# Altium PCB pwr_V1.1.PcbDoc (part 2 of 2)
Units mm, origin at the board's own origin, x right, y up, seen from the top; angles counter-clockwise.
Board outline 150.51 x 150.51 mm, 4 copper layers (Top Layer, GND, VCC, Bottom Layer); 133 components, 126 nets, 409 pads, 2275 vias.
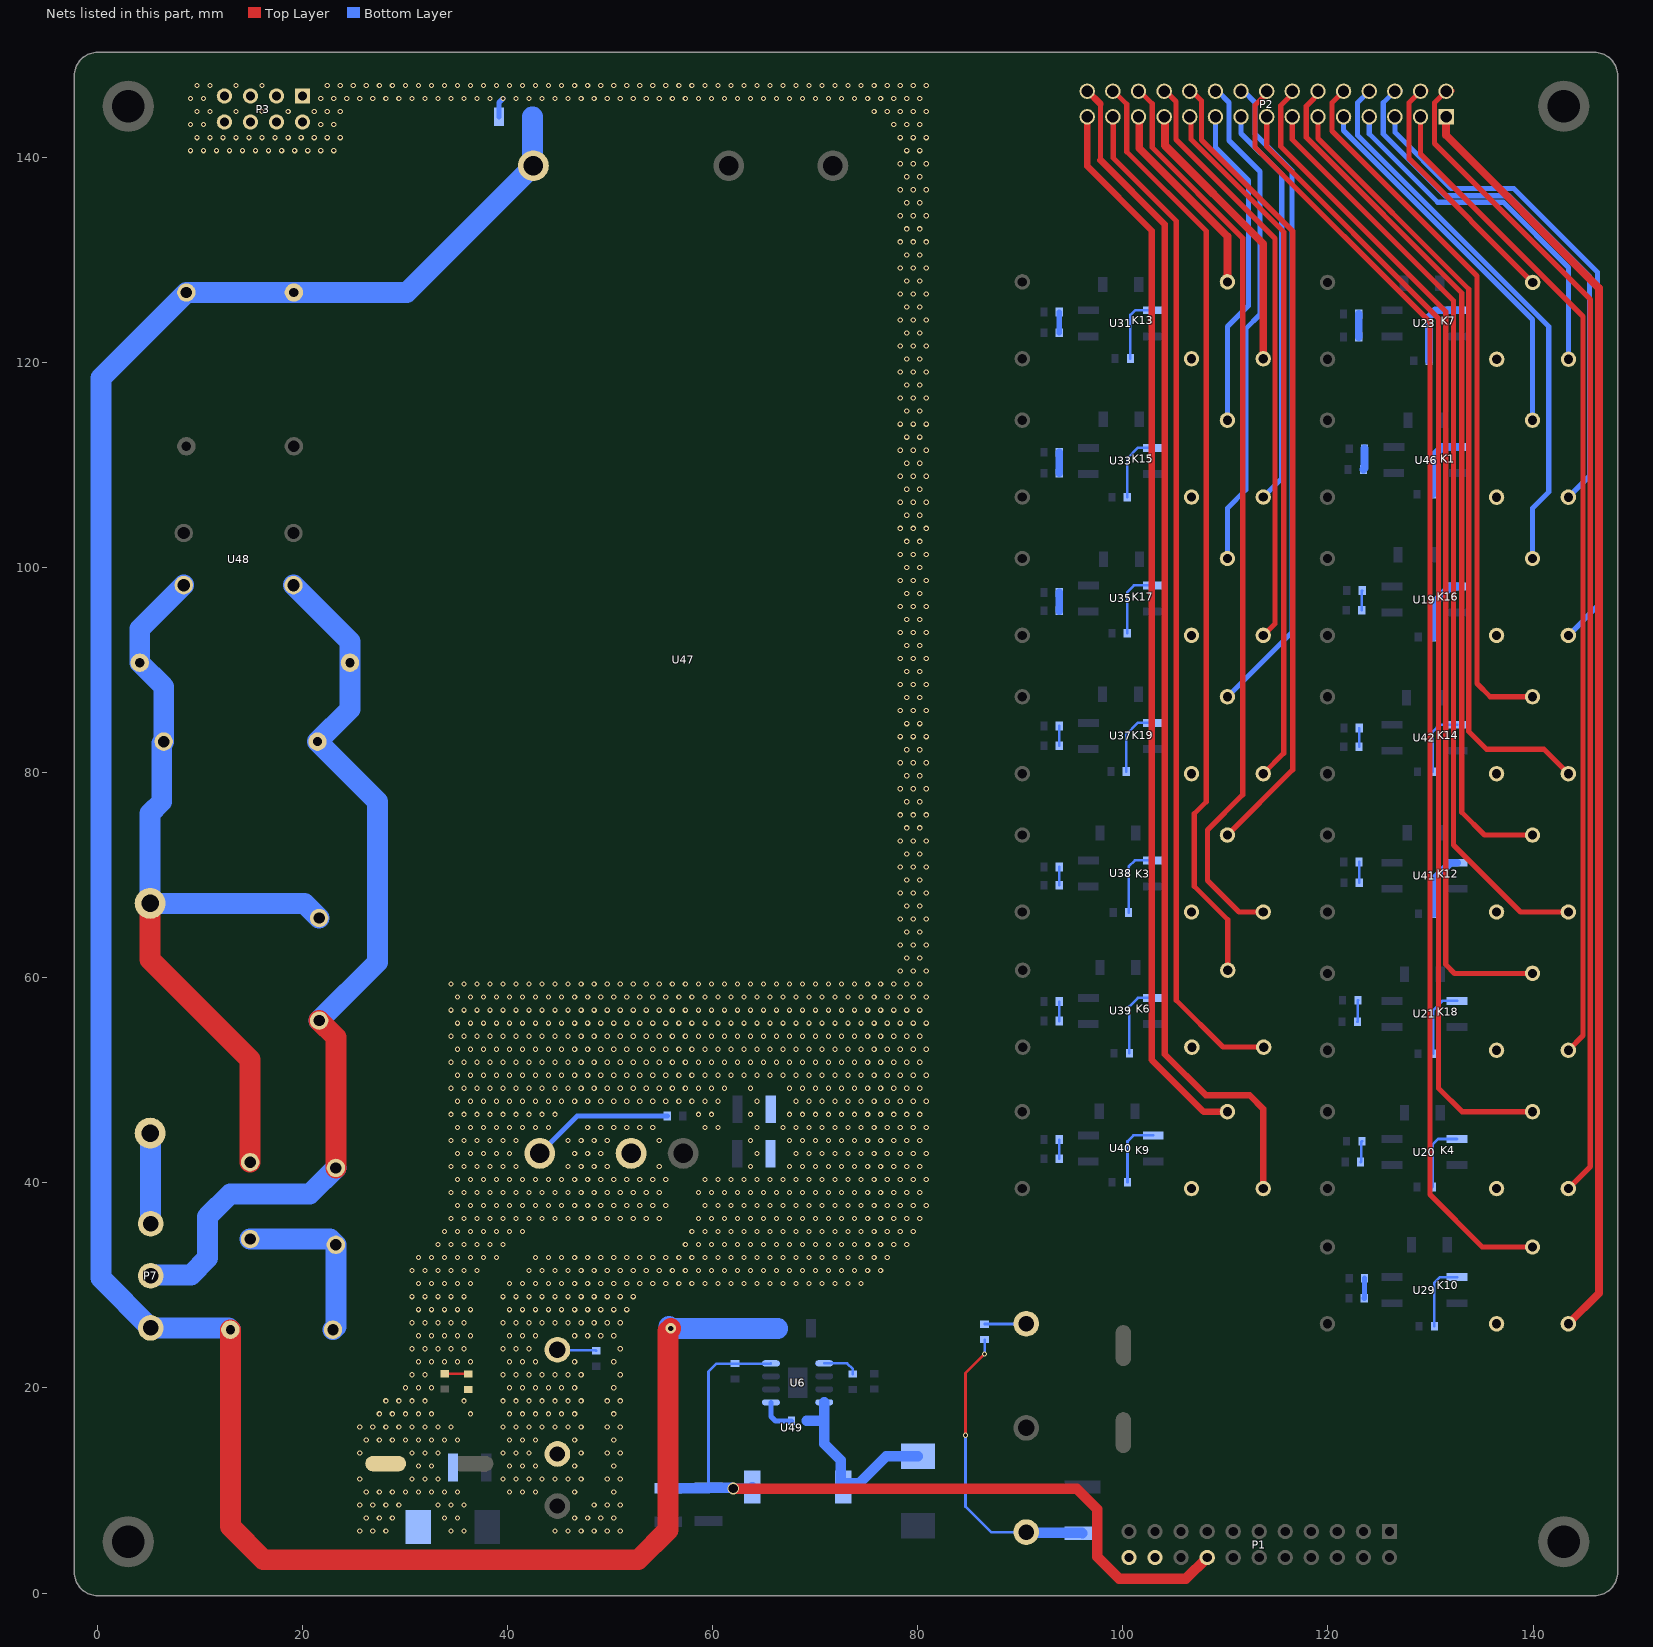
[diagram p2: the nets of this part, all layers, seen from the top]

## Via types
v1: diameter 0.508, hole 0.305, Top Layer to Bottom Layer, tented both sides, 2255 vias
v2: diameter 1.016, hole 0.508, Top Layer to Bottom Layer, tented both sides, 17 vias
v3: diameter 1.143, hole 0.889, Top Layer to Bottom Layer, tented both sides, 1 vias
v4: diameter 1.143, hole 0.762, Top Layer to Bottom Layer, tented both sides, 1 vias
v5: diameter 1.5, hole 1, Top Layer to Bottom Layer, 1 vias

## Nets (pads, with @x,y where several pads share a name; then routed paths per layer and width w, separated by ;. In a path a pad name is that pad's centre, name@x,y a point inside that pad or via, vN(x,y) a via of type N, cw(c..) or ccw(c..) an arc to the next point about the centre after c; other vN are vias at no path point) (continued)
GND: C44.2 C132.1 C134.1 C135.1 C136.1 D26.1 LED17.2 P1.20 P1.22 P3.1 P3.2 P3.3 P3.4 P3.5 P3.6 P3.7 P3.8 U47.5 U49.2 | length 1.9
  Bottom Layer w0.508: C132.1@39.168,143.967 39.168,145.361 v1(39.552,145.745)
  other v1: 25.582,6.045 26.852,6.045 28.122,6.045 34.472,6.045 35.742,6.045 44.632,6.045 45.902,6.045 47.172,6.045 48.442,6.045 49.712,6.045 50.982,6.045 26.217,7.315 27.487,7.315 28.757,7.315 33.837,7.315 35.107,7.315 46.537,7.315 47.807,7.315 49.077,7.315 50.347,7.315 25.582,8.585 26.852,8.585 28.122,8.585 29.392,8.585 33.202,8.585 34.472,8.585 35.742,8.585 48.442,8.585 49.712,8.585 50.982,8.585 26.217,9.855 27.487,9.855 28.757,9.855 30.027,9.855 31.297,9.855 32.567,9.855 33.837,9.855 35.107,9.855 40.187,9.855 41.457,9.855 42.727,9.855 46.537,9.855 50.347,9.855 25.582,11.125 30.662,11.125 31.932,11.125 33.202,11.125 39.552,11.125 40.822,11.125 42.092,11.125 43.362,11.125 44.632,11.125 45.902,11.125 47.172,11.125 49.712,11.125 50.982,11.125 31.297,12.395 32.567,12.395 40.187,12.395 41.457,12.395 42.727,12.395 46.537,12.395 50.347,12.395 25.582,13.665 30.662,13.665 31.932,13.665 33.202,13.665 39.552,13.665 40.822,13.665 42.092,13.665 47.172,13.665 49.712,13.665 50.982,13.665 26.217,14.935 27.487,14.935 28.757,14.935 30.027,14.935 31.297,14.935 32.567,14.935 33.837,14.935 35.107,14.935 40.187,14.935 41.457,14.935 42.727,14.935 46.537,14.935 50.347,14.935 25.582,16.205 26.852,16.205 28.122,16.205 29.392,16.205 30.662,16.205 31.932,16.205 33.202,16.205 34.472,16.205 39.552,16.205 40.822,16.205 42.092,16.205 43.362,16.205 44.632,16.205 45.902,16.205 47.172,16.205 49.712,16.205 50.982,16.205 27.487,17.475 28.757,17.475 30.027,17.475 31.297,17.475 32.567,17.475 36.377,17.475 40.187,17.475 41.457,17.475 42.727,17.475 43.997,17.475 45.267,17.475 46.537,17.475 50.347,17.475 28.122,18.745 29.392,18.745 30.662,18.745 31.932,18.745 35.742,18.745 39.552,18.745 40.822,18.745 42.092,18.745 43.362,18.745 44.632,18.745 45.902,18.745 47.172,18.745 49.712,18.745 50.982,18.745 30.027,20.015 31.297,20.015 32.567,20.015 40.187,20.015 41.457,20.015 42.727,20.015 43.997,20.015 45.267,20.015 46.537,20.015 50.347,20.015 30.662,21.285 31.932,21.285 39.552,21.285 40.822,21.285 42.092,21.285 43.362,21.285 44.632,21.285 45.902,21.285 47.172,21.285 50.982,21.285 31.297,22.555 32.567,22.555 33.837,22.555 35.107,22.555 36.377,22.555 40.187,22.555 41.457,22.555 42.727,22.555 46.537,22.555 50.347,22.555 30.662,23.825 31.932,23.825 33.202,23.825 34.472,23.825 35.742,23.825 39.552,23.825 40.822,23.825 42.092,23.825 50.982,23.825 31.297,25.095 32.567,25.095 33.837,25.095 35.107,25.095 36.377,25.095 40.187,25.095 41.457,25.095 42.727,25.095 46.537,25.095 47.807,25.095 49.077,25.095 50.347,25.095 30.662,26.365 31.932,26.365 33.202,26.365 34.472,26.365 35.742,26.365 39.552,26.365 40.822,26.365 42.092,26.365 43.362,26.365 44.632,26.365 45.902,26.365 47.172,26.365 48.442,26.365 49.712,26.365 50.982,26.365 31.297,27.635 32.567,27.635 33.837,27.635 35.107,27.635 36.377,27.635 40.187,27.635 41.457,27.635 42.727,27.635 43.997,27.635 45.267,27.635 46.537,27.635 47.807,27.635 49.077,27.635 50.347,27.635 51.617,27.635 30.662,28.905 31.932,28.905 33.202,28.905 34.472,28.905 35.742,28.905 39.552,28.905 40.822,28.905 42.092,28.905 43.362,28.905 44.632,28.905 45.902,28.905 47.172,28.905 48.442,28.905 49.712,28.905 50.982,28.905 52.252,28.905 31.297,30.175 32.567,30.175 33.837,30.175 35.107,30.175 36.377,30.175 40.187,30.175 41.457,30.175 42.727,30.175 43.997,30.175 45.267,30.175 46.537,30.175 47.807,30.175 49.077,30.175 50.347,30.175 51.617,30.175 52.887,30.175 54.157,30.175 55.427,30.175 56.697,30.175 57.967,30.175 59.237,30.175 60.507,30.175 61.777,30.175 63.047,30.175 64.317,30.175 65.587,30.175 66.857,30.175 68.127,30.175 69.397,30.175 70.667,30.175 71.937,30.175 73.207,30.175 74.477,30.175 30.662,31.445 31.932,31.445 33.202,31.445 34.472,31.445 35.742,31.445 37.012,31.445 42.092,31.445 43.362,31.445 44.632,31.445 45.902,31.445 47.172,31.445 48.442,31.445 49.712,31.445 50.982,31.445 52.252,31.445 53.522,31.445 54.792,31.445 56.062,31.445 57.332,31.445 58.602,31.445 59.872,31.445 61.142,31.445 62.412,31.445 63.682,31.445 64.952,31.445 66.222,31.445 67.492,31.445 68.762,31.445 70.032,31.445 71.302,31.445 72.572,31.445 73.842,31.445 75.112,31.445 76.382,31.445 31.297,32.715 32.567,32.715 33.837,32.715 35.107,32.715 36.377,32.715 37.647,32.715 38.917,32.715 42.727,32.715 43.997,32.715 45.267,32.715 46.537,32.715 47.807,32.715 49.077,32.715 50.347,32.715 51.617,32.715 52.887,32.715 54.157,32.715 55.427,32.715 56.697,32.715 57.967,32.715 59.237,32.715 60.507,32.715 61.777,32.715 63.047,32.715 64.317,32.715 65.587,32.715 66.857,32.715 68.127,32.715 69.397,32.715 70.667,32.715 71.937,32.715 73.207,32.715 74.477,32.715 75.747,32.715 77.017,32.715 33.202,33.985 34.472,33.985 35.742,33.985 37.012,33.985 38.282,33.985 39.552,33.985 57.332,33.985 58.602,33.985 59.872,33.985 61.142,33.985 62.412,33.985 63.682,33.985 64.952,33.985 66.222,33.985 67.492,33.985 68.762,33.985 70.032,33.985 71.302,33.985 72.572,33.985 73.842,33.985 75.112,33.985 76.382,33.985 77.652,33.985 78.922,33.985 33.837,35.255 35.107,35.255 36.377,35.255 37.647,35.255 38.917,35.255 40.187,35.255 41.457,35.255 57.967,35.255 59.237,35.255 60.507,35.255 61.777,35.255 63.047,35.255 64.317,35.255 65.587,35.255 66.857,35.255 68.127,35.255 69.397,35.255 70.667,35.255 71.937,35.255 73.207,35.255 74.477,35.255 75.747,35.255 77.017,35.255 78.287,35.255 79.557,35.255 34.472,36.525 35.742,36.525 37.012,36.525 38.282,36.525 39.552,36.525 40.822,36.525 42.092,36.525 43.362,36.525 44.632,36.525 45.902,36.525 47.172,36.525 48.442,36.525 49.712,36.525 50.982,36.525 52.252,36.525 53.522,36.525 54.792,36.525 58.602,36.525 59.872,36.525 61.142,36.525 62.412,36.525 63.682,36.525 64.952,36.525 66.222,36.525 67.492,36.525 68.762,36.525 70.032,36.525 71.302,36.525 72.572,36.525 73.842,36.525 75.112,36.525 76.382,36.525 77.652,36.525 78.922,36.525 80.192,36.525 35.107,37.795 36.377,37.795 37.647,37.795 38.917,37.795 40.187,37.795 41.457,37.795 42.727,37.795 43.997,37.795 45.267,37.795 46.537,37.795 47.807,37.795 49.077,37.795 50.347,37.795 51.617,37.795 52.887,37.795 54.157,37.795 55.427,37.795 59.237,37.795 60.507,37.795 61.777,37.795 63.047,37.795 64.317,37.795 65.587,37.795 66.857,37.795 68.127,37.795 69.397,37.795 70.667,37.795 71.937,37.795 73.207,37.795 74.477,37.795 75.747,37.795 77.017,37.795 78.287,37.795 79.557,37.795 80.827,37.795 34.472,39.065 35.742,39.065 37.012,39.065 38.282,39.065 39.552,39.065 40.822,39.065 42.092,39.065 43.362,39.065 44.632,39.065 45.902,39.065 47.172,39.065 48.442,39.065 49.712,39.065 50.982,39.065 52.252,39.065 53.522,39.065 54.792,39.065 58.602,39.065 59.872,39.065 61.142,39.065 62.412,39.065 63.682,39.065 64.952,39.065 66.222,39.065 67.492,39.065 68.762,39.065 70.032,39.065 71.302,39.065 72.572,39.065 73.842,39.065 75.112,39.065 76.382,39.065 77.652,39.065 78.922,39.065 80.192,39.065 35.107,40.335 36.377,40.335 37.647,40.335 38.917,40.335 40.187,40.335 41.457,40.335 42.727,40.335 43.997,40.335 45.267,40.335 46.537,40.335 47.807,40.335 49.077,40.335 50.347,40.335 51.617,40.335 52.887,40.335 54.157,40.335 55.427,40.335 59.237,40.335 60.507,40.335 61.777,40.335 63.047,40.335 64.317,40.335 65.587,40.335 66.857,40.335 68.127,40.335 69.397,40.335 70.667,40.335 71.937,40.335 73.207,40.335 74.477,40.335 75.747,40.335 77.017,40.335 78.287,40.335 79.557,40.335 80.827,40.335 34.472,41.605 35.742,41.605 37.012,41.605 38.282,41.605 39.552,41.605 40.822,41.605 45.902,41.605 47.172,41.605 48.442,41.605 49.712,41.605 54.792,41.605 63.682,41.605 67.492,41.605 68.762,41.605 70.032,41.605 71.302,41.605 72.572,41.605 73.842,41.605 75.112,41.605 76.382,41.605 77.652,41.605 78.922,41.605 80.192,41.605 35.107,42.875 36.377,42.875 37.647,42.875 38.917,42.875 40.187,42.875 46.537,42.875 47.807,42.875 49.077,42.875 64.317,42.875 68.127,42.875 69.397,42.875 70.667,42.875 71.937,42.875 73.207,42.875 74.477,42.875 75.747,42.875 77.017,42.875 78.287,42.875 79.557,42.875 80.827,42.875 34.472,44.145 35.742,44.145 37.012,44.145 38.282,44.145 39.552,44.145 40.822,44.145 45.902,44.145 47.172,44.145 48.442,44.145 49.712,44.145 54.792,44.145 63.682,44.145 67.492,44.145 68.762,44.145 70.032,44.145 71.302,44.145 72.572,44.145 73.842,44.145 75.112,44.145 76.382,44.145 77.652,44.145 78.922,44.145 80.192,44.145 35.107,45.415 36.377,45.415 37.647,45.415 38.917,45.415 40.187,45.415 41.457,45.415 42.727,45.415 43.997,45.415 47.807,45.415 49.077,45.415 50.347,45.415 51.617,45.415 52.887,45.415 54.157,45.415 59.237,45.415 60.507,45.415 64.317,45.415 66.857,45.415 68.127,45.415 69.397,45.415 70.667,45.415 71.937,45.415 73.207,45.415 74.477,45.415 75.747,45.415 77.017,45.415 78.287,45.415 79.557,45.415 80.827,45.415 34.472,46.685 35.742,46.685 37.012,46.685 38.282,46.685 39.552,46.685 40.822,46.685 42.092,46.685 43.362,46.685 44.632,46.685 58.602,46.685 59.872,46.685 63.682,46.685 67.492,46.685 68.762,46.685 70.032,46.685 71.302,46.685 72.572,46.685 73.842,46.685 75.112,46.685 76.382,46.685 77.652,46.685 78.922,46.685 80.192,46.685 35.107,47.955 36.377,47.955 37.647,47.955 38.917,47.955 40.187,47.955 41.457,47.955 42.727,47.955 43.997,47.955 45.267,47.955 46.537,47.955 47.807,47.955 49.077,47.955 50.347,47.955 51.617,47.955 52.887,47.955 54.157,47.955 55.427,47.955 56.697,47.955 57.967,47.955 59.237,47.955 60.507,47.955 64.317,47.955 68.127,47.955 69.397,47.955 70.667,47.955 71.937,47.955 73.207,47.955 74.477,47.955 75.747,47.955 77.017,47.955 78.287,47.955 79.557,47.955 80.827,47.955 34.472,49.225 35.742,49.225 37.012,49.225 38.282,49.225 39.552,49.225 40.822,49.225 42.092,49.225 43.362,49.225 44.632,49.225 45.902,49.225 47.172,49.225 48.442,49.225 49.712,49.225 50.982,49.225 52.252,49.225 53.522,49.225 54.792,49.225 56.062,49.225 57.332,49.225 58.602,49.225 59.872,49.225 61.142,49.225 63.682,49.225 67.492,49.225 68.762,49.225 70.032,49.225 71.302,49.225 72.572,49.225 73.842,49.225 75.112,49.225 76.382,49.225 77.652,49.225 78.922,49.225 80.192,49.225 35.107,50.495 36.377,50.495 37.647,50.495 38.917,50.495 40.187,50.495 41.457,50.495 42.727,50.495 43.997,50.495 45.267,50.495 46.537,50.495 47.807,50.495 49.077,50.495 50.347,50.495 51.617,50.495 52.887,50.495 54.157,50.495 55.427,50.495 56.697,50.495 57.967,50.495 59.237,50.495 60.507,50.495 61.777,50.495 63.047,50.495 64.317,50.495 65.587,50.495 66.857,50.495 68.127,50.495 69.397,50.495 70.667,50.495 71.937,50.495 73.207,50.495 74.477,50.495 75.747,50.495 77.017,50.495 78.287,50.495 79.557,50.495 80.827,50.495 34.472,51.765 35.742,51.765 37.012,51.765 38.282,51.765 39.552,51.765 40.822,51.765 42.092,51.765 43.362,51.765 44.632,51.765 45.902,51.765 47.172,51.765 48.442,51.765 49.712,51.765 50.982,51.765 52.252,51.765 53.522,51.765 54.792,51.765 56.062,51.765 57.332,51.765 58.602,51.765 59.872,51.765 61.142,51.765 62.412,51.765 63.682,51.765 64.952,51.765 66.222,51.765 67.492,51.765 68.762,51.765 70.032,51.765 71.302,51.765 72.572,51.765 73.842,51.765 75.112,51.765 76.382,51.765 77.652,51.765 78.922,51.765 80.192,51.765 35.107,53.035 36.377,53.035 37.647,53.035 38.917,53.035 40.187,53.035 41.457,53.035 42.727,53.035 43.997,53.035 45.267,53.035 46.537,53.035 47.807,53.035 49.077,53.035 50.347,53.035 51.617,53.035 52.887,53.035 54.157,53.035 55.427,53.035 56.697,53.035 57.967,53.035 59.237,53.035 60.507,53.035 61.777,53.035 63.047,53.035 64.317,53.035 65.587,53.035 66.857,53.035 68.127,53.035 69.397,53.035 70.667,53.035 71.937,53.035 73.207,53.035 74.477,53.035 75.747,53.035 77.017,53.035 78.287,53.035 79.557,53.035 80.827,53.035 34.472,54.305 35.742,54.305 37.012,54.305 38.282,54.305 39.552,54.305 40.822,54.305 42.092,54.305 43.362,54.305 44.632,54.305 45.902,54.305 47.172,54.305 48.442,54.305 49.712,54.305 50.982,54.305 52.252,54.305 53.522,54.305 54.792,54.305 56.062,54.305 57.332,54.305 58.602,54.305 59.872,54.305 61.142,54.305 62.412,54.305 63.682,54.305 64.952,54.305 66.222,54.305 67.492,54.305 68.762,54.305 70.032,54.305 71.302,54.305 72.572,54.305 73.842,54.305 75.112,54.305 76.382,54.305 77.652,54.305 78.922,54.305 80.192,54.305 35.107,55.575 36.377,55.575 37.647,55.575 38.917,55.575 40.187,55.575 41.457,55.575 42.727,55.575 43.997,55.575 45.267,55.575 46.537,55.575 47.807,55.575 49.077,55.575 50.347,55.575 51.617,55.575 52.887,55.575 54.157,55.575 55.427,55.575 56.697,55.575 57.967,55.575 59.237,55.575 60.507,55.575 61.777,55.575 63.047,55.575 64.317,55.575 65.587,55.575 66.857,55.575 68.127,55.575 69.397,55.575 70.667,55.575 71.937,55.575 73.207,55.575 74.477,55.575 75.747,55.575 77.017,55.575 78.287,55.575 79.557,55.575 80.827,55.575 34.472,56.845 35.742,56.845 37.012,56.845 38.282,56.845 39.552,56.845 40.822,56.845 42.092,56.845 43.362,56.845 44.632,56.845 45.902,56.845 47.172,56.845 48.442,56.845 49.712,56.845 50.982,56.845 52.252,56.845 53.522,56.845 54.792,56.845 56.062,56.845 57.332,56.845 58.602,56.845 59.872,56.845 61.142,56.845 62.412,56.845 63.682,56.845 64.952,56.845 66.222,56.845 67.492,56.845 68.762,56.845 70.032,56.845 71.302,56.845 72.572,56.845 73.842,56.845 75.112,56.845 76.382,56.845 77.652,56.845 78.922,56.845 80.192,56.845 35.107,58.115 36.377,58.115 37.647,58.115 38.917,58.115 40.187,58.115 41.457,58.115 42.727,58.115 43.997,58.115 45.267,58.115 46.537,58.115 47.807,58.115 49.077,58.115 50.347,58.115 51.617,58.115 52.887,58.115 54.157,58.115 55.427,58.115 56.697,58.115 57.967,58.115 59.237,58.115 60.507,58.115 61.777,58.115 63.047,58.115 64.317,58.115 65.587,58.115 66.857,58.115 68.127,58.115 69.397,58.115 70.667,58.115 71.937,58.115 73.207,58.115 74.477,58.115 75.747,58.115 77.017,58.115 78.287,58.115 79.557,58.115 80.827,58.115 34.472,59.385 35.742,59.385 37.012,59.385 38.282,59.385 39.552,59.385 40.822,59.385 42.092,59.385 43.362,59.385 44.632,59.385 45.902,59.385 47.172,59.385 48.442,59.385 49.712,59.385 50.982,59.385 52.252,59.385 53.522,59.385 54.792,59.385 56.062,59.385 57.332,59.385 58.602,59.385 59.872,59.385 61.142,59.385 62.412,59.385 63.682,59.385 64.952,59.385 66.222,59.385 67.492,59.385 68.762,59.385 70.032,59.385 71.302,59.385 72.572,59.385 73.842,59.385 75.112,59.385 76.382,59.385 77.652,59.385 78.922,59.385 80.192,59.385 78.287,60.655 79.557,60.655 80.827,60.655 78.922,61.925 80.192,61.925 78.287,63.195 79.557,63.195 80.827,63.195 78.922,64.465 80.192,64.465 78.287,65.735 79.557,65.735 80.827,65.735 78.922,67.005 80.192,67.005 78.287,68.275 79.557,68.275 80.827,68.275 78.922,69.545 80.192,69.545 78.287,70.815 79.557,70.815 80.827,70.815 78.922,72.085 80.192,72.085 78.287,73.355 79.557,73.355 80.827,73.355 78.922,74.625 80.192,74.625 78.287,75.895 79.557,75.895 80.827,75.895 78.922,77.165 80.192,77.165 78.287,78.435 79.557,78.435 80.827,78.435 78.922,79.705 80.192,79.705 78.287,80.975 79.557,80.975 80.827,80.975 78.922,82.245 80.192,82.245 78.287,83.515 79.557,83.515 80.827,83.515 78.922,84.785 80.192,84.785 78.287,86.055 79.557,86.055 80.827,86.055 78.922,87.325 80.192,87.325 78.287,88.595 79.557,88.595 80.827,88.595 78.922,89.865 80.192,89.865 78.287,91.135 79.557,91.135 80.827,91.135 78.922,92.405 80.192,92.405 78.287,93.675 79.557,93.675 80.827,93.675 78.922,94.945 80.192,94.945 78.287,96.215 79.557,96.215 80.827,96.215 78.922,97.485 80.192,97.485 78.287,98.755 79.557,98.755 80.827,98.755 78.922,100.025 80.192,100.025 78.287,101.295 79.557,101.295 80.827,101.295 78.922,102.565 80.192,102.565 78.287,103.835 79.557,103.835 80.827,103.835 78.922,105.105 80.192,105.105 78.287,106.375 79.557,106.375 80.827,106.375 78.922,107.645 80.192,107.645 78.287,108.915 79.557,108.915 80.827,108.915 78.922,110.185 80.192,110.185 78.287,111.455 79.557,111.455 80.827,111.455 78.922,112.725 80.192,112.725 78.287,113.995 79.557,113.995 80.827,113.995 78.922,115.265 80.192,115.265 78.287,116.535 79.557,116.535 80.827,116.535 78.922,117.805 80.192,117.805 78.287,119.075 79.557,119.075 80.827,119.075 78.922,120.345 80.192,120.345 78.287,121.615 79.557,121.615 80.827,121.615 78.922,122.885 80.192,122.885 78.287,124.155 79.557,124.155 80.827,124.155 78.922,125.425 80.192,125.425 78.287,126.695 79.557,126.695 80.827,126.695 78.922,127.965 80.192,127.965 78.287,129.235 79.557,129.235 80.827,129.235 78.922,130.505 80.192,130.505 78.287,131.775 79.557,131.775 80.827,131.775 78.922,133.045 80.192,133.045 78.287,134.315 79.557,134.315 80.827,134.315 78.922,135.585 80.192,135.585 78.287,136.855 79.557,136.855 80.827,136.855 78.922,138.125 80.192,138.125 78.287,139.395 79.557,139.395 80.827,139.395 9.072,140.665 10.342,140.665 11.612,140.665 12.882,140.665 14.152,140.665 15.422,140.665 16.692,140.665 17.962,140.665 19.232,140.665 20.502,140.665 21.772,140.665 23.042,140.665 78.922,140.665 80.192,140.665 9.707,141.935 10.977,141.935 12.247,141.935 13.517,141.935 14.787,141.935 16.057,141.935 17.327,141.935 18.597,141.935 19.867,141.935 21.137,141.935 22.407,141.935 23.677,141.935 78.287,141.935 79.557,141.935 80.827,141.935 9.072,143.205 10.342,143.205 21.772,143.205 23.042,143.205 77.652,143.205 78.922,143.205 80.192,143.205 9.707,144.475 10.977,144.475 13.517,144.475 16.057,144.475 18.597,144.475 21.137,144.475 22.407,144.475 23.677,144.475 75.747,144.475 77.017,144.475 78.287,144.475 79.557,144.475 80.827,144.475 9.072,145.745 10.342,145.745 21.772,145.745 23.042,145.745 24.312,145.745 25.582,145.745 26.852,145.745 28.122,145.745 29.392,145.745 30.662,145.745 31.932,145.745 33.202,145.745 34.472,145.745 35.742,145.745 37.012,145.745 38.282,145.745 40.822,145.745 42.092,145.745 43.362,145.745 44.632,145.745 45.902,145.745 47.172,145.745 48.442,145.745 49.712,145.745 50.982,145.745 52.252,145.745 53.522,145.745 54.792,145.745 56.062,145.745 57.332,145.745 58.602,145.745 59.872,145.745 61.142,145.745 62.412,145.745 63.682,145.745 64.952,145.745 66.222,145.745 67.492,145.745 68.762,145.745 70.032,145.745 71.302,145.745 72.572,145.745 73.842,145.745 75.112,145.745 76.382,145.745 77.652,145.745 78.922,145.745 80.192,145.745 9.707,147.015 10.977,147.015 13.517,147.015 16.057,147.015 22.407,147.015 23.677,147.015 24.947,147.015 26.217,147.015 27.487,147.015 28.757,147.015 30.027,147.015 31.297,147.015 32.567,147.015 33.837,147.015 35.107,147.015 36.377,147.015 37.647,147.015 38.917,147.015 40.187,147.015 41.457,147.015 42.727,147.015 43.997,147.015 45.267,147.015 46.537,147.015 47.807,147.015 49.077,147.015 50.347,147.015 51.617,147.015 52.887,147.015 54.157,147.015 55.427,147.015 56.697,147.015 57.967,147.015 59.237,147.015 60.507,147.015 61.777,147.015 63.047,147.015 64.317,147.015 65.587,147.015 66.857,147.015 68.127,147.015 69.397,147.015 70.667,147.015 71.937,147.015 73.207,147.015 74.477,147.015 75.747,147.015 77.017,147.015 78.287,147.015 79.557,147.015 80.827,147.015
NetC62_2: C62.2 C129.1 C131.2 C132.2 P7.3 R177.1 U47.3 | length 252.9
  Top Layer w2.032: R177.1@12.961,25.679 12.961,6.496 16.205,3.251 52.743,3.251 55.651,6.16 55.651,25.552 v2(55.905,25.806)
  Bottom Layer w2.032: R177.1@12.961,25.679 12.783,25.857 P7.3@5.188,25.857 0.33,30.715 0.33,118.498 C131.2@8.668,126.836 C129.1@19.152,126.836 30.157,126.836 U47.3@42.516,139.195 42.418,139.293 C132.2@42.418,143.967 ; v2@55.728,25.984 v2(55.905,25.806) C62.2@66.345,25.806
NetC87_2: C87.2 R123.1 | length 2
  Bottom Layer w0.254: R123.1@123.292,95.834 123.317,95.86 123.317,97.739 C87.2@123.342,97.765
NetC88_2: C88.2 R125.1 | length 2.1
  Bottom Layer w0.254: R125.1@123.19,42.037 123.254,42.101 123.254,44.005 C88.2@123.318,44.069
NetC89_2: C89.2 R126.1 | length 2.1
  Bottom Layer w0.254: R126.1@122.885,55.702 122.911,55.728 122.911,57.785 C89.2@122.936,57.81
NetC90_2: C90.2 R122.1 | length 2.1
  Bottom Layer w0.762: R122.1@123.471,109.576 123.471,109.589 123.572,109.69 C90.2@123.572,111.608
NetC91_2: C91.2 R129.1 | length 2.2
  Bottom Layer w0.762: R129.1@123.014,122.504 C91.2@123.013,124.739
NetC93_2: C93.2 R133.1 | length 2
  Bottom Layer w0.508: R133.1@123.547,28.748 123.559,28.76 123.559,30.692 C93.2@123.571,30.704
NetC95_2: C95.2 R137.1 | length 2
  Bottom Layer w0.508: R137.1@93.802,122.911 C95.2@93.802,124.943
NetC98_2: C98.2 R141.1 | length 2
  Bottom Layer w0.762: R141.1@93.802,109.22 C98.2@93.802,111.252
NetC102_2: C102.2 R145.1 | length 1.8
  Bottom Layer w0.762: R145.1@93.802,95.783 C102.2@93.802,97.587
NetC104_2: C104.2 R149.1 | length 1.9
  Bottom Layer w0.254: R149.1@93.802,82.626 C104.2@93.802,84.557
NetC106_2: C106.2 R151.1 | length 1.8
  Bottom Layer w0.254: R151.1@93.802,69.037 C106.2@93.802,70.815
NetC107_2: C107.2 R153.1 | length 1.9
  Bottom Layer w0.254: R153.1@93.802,55.778 C107.2@93.802,57.683
NetC109_2: C109.2 R155.1 | length 1.9
  Bottom Layer w0.254: R155.1@93.802,42.367 C109.2@93.802,44.221
NetC110_2: C110.2 R157.1 | length 2
  Bottom Layer w0.254: C110.2@123.038,71.298 123.05,71.285 123.05,69.279 R157.1@123.063,69.266
NetC111_2: C111.2 R159.1 | length 1.8
  Bottom Layer w0.254: R159.1@123.038,82.525 123.05,82.537 123.05,84.341 C111.2@123.063,84.353
NetC130_1: C130.1 P7.2 R174.2 R175.1 R176.1 U48.1 | length 90.7
  Top Layer w2.032: R175.1@21.615,55.829 23.248,54.197 R176.1@23.248,41.46
  Bottom Layer w2.032: P7.2@5.188,30.937 5.278,31.027 9.107,31.027 10.744,32.664 10.744,36.703 12.954,38.913 20.701,38.913 R176.1@23.248,41.46 ; U48.1@19.114,98.298 24.621,92.791 R174.2@24.621,90.729 24.621,86.196 C130.1@21.458,83.033 27.305,77.186 27.305,61.519 R175.1@21.615,55.829
NetC130_2: C130.2 F3.2 R173.2 R174.1 R175.2 U48.2 | length 80.7
  Top Layer w2.032: F3.2@5.131,67.256 5.131,61.798 14.891,52.038 R173.2@14.891,42.019
  Bottom Layer w2.032: U48.2@8.414,98.298 4.121,94.005 R174.1@4.121,90.729 6.458,88.392 C130.2@6.458,83.033 6.274,82.848 6.274,77.165 5.131,76.022 F3.2@5.131,67.256 20.188,67.256 R175.2@21.615,65.829
NetC137_1: C137.1 D4.2 L3.1 U6.8 | length 19.3
  Bottom Layer w1.016: C137.1@69.19,16.789 70.667,16.789 70.875,16.582 ; U6.8@70.875,18.593 70.875,16.582 ; D4.2@80.01,13.329 76.905,13.329 74.27,10.693 73.038,10.693 72.746,10.401 L3.1@72.746,10.338 72.492,10.592 72.492,12.954 70.875,14.57 70.875,16.582
NetC137_2: C137.2 U6.1 | length 3.6
  Bottom Layer w0.508: U6.1@65.675,18.593 65.675,17.23 66.116,16.789 C137.2@67.69,16.789
NetF3_1: F3.1 P7.1 | length 8.9
  Bottom Layer w2.032: F3.1@5.131,44.856 5.159,44.828 5.159,36.046 P7.1@5.188,36.017
NetF4_1: F4.1 R178.2 U49.4 | length 29.5
  Top Layer w0.254: v1(84.658,15.392) 84.658,21.463 v1(86.512,23.317)
  Bottom Layer w0.254: v1(84.658,15.392) 84.658,8.433 87.147,5.944 U49.4@90.576,5.944 ; v1(86.512,23.317) R178.2@86.512,24.714
  Bottom Layer w1.016: U49.4@90.576,5.944 90.627,5.893 96.012,5.893 F4.1@96.063,5.842
NetLED17_1: LED17.1 R102.1 | length 2.3
  Top Layer w0.254: R102.1@33.858,21.388 33.871,21.375 36.157,21.375 LED17.1@36.17,21.363
NetR25_2: R25.2 U49.1 | length 3.8
  Bottom Layer w0.254: U49.1@44.856,23.724 44.906,23.674 48.591,23.674 R25.2@48.641,23.623
NetR31_1: R31.1 U47.4 | length 14
  Bottom Layer w0.508: U47.4@43.136,42.875 46.793,46.533 R31.1@55.575,46.533
NetR107_1: R107.1 U46.1 | length 6.6
  Bottom Layer w0.762: R107.1@130.2,107.163 130.2,110.795 131.166,111.76 U46.1@132.766,111.76
NetR124_1: R124.1 U19.1 | length 6.2
  Bottom Layer w0.762: R124.1@130.302,93.243 130.302,96.505 131.953,98.156 U19.1@132.588,98.156
NetR127_1: R127.1 U20.1 | length 6.8
  Bottom Layer w0.254: R127.1@130.202,39.599 130.202,43.74 130.741,44.279 U20.1@132.588,44.279
NetR128_1: R128.1 U21.1 | length 6.9
  Bottom Layer w0.254: R128.1@130.278,52.603 130.278,56.872 131.155,57.749 U21.1@132.588,57.749
NetR131_1: R131.1 U23.1 | length 7.3
  Bottom Layer w0.762: R131.1@129.87,120.167 129.87,124.46 130.505,125.095 U23.1@132.588,125.095
NetR135_1: R135.1 U29.1 | length 6.7
  Bottom Layer w0.254: R135.1@130.38,26.01 130.38,30.278 130.912,30.81 U29.1@132.588,30.81
NetR139_1: R139.1 U31.1 | length 6.7
  Bottom Layer w0.254: R139.1@100.738,120.396 100.738,124.639 101.194,125.095 U31.1@102.972,125.095
NetR142_1: R142.1 U33.1 | length 6.8
  Bottom Layer w0.254: R142.1@100.433,106.858 100.433,110.669 101.448,111.684 U33.1@102.972,111.684
NetR147_1: R147.1 U35.1 | length 6.8
  Bottom Layer w0.254: R147.1@100.432,93.599 100.432,97.612 101.092,98.273 U35.1@102.972,98.273
NetR150_1: R150.1 U37.1 | length 6.7
  Bottom Layer w0.254: R150.1@100.331,80.112 100.331,83.745 101.448,84.861 U37.1@102.972,84.861
NetR152_1: R152.1 U38.1 | length 7.1
  Bottom Layer w0.254: R152.1@100.559,66.37 100.559,70.841 101.168,71.45 U38.1@102.972,71.45
NetR154_1: R154.1 U39.1 | length 7.2
  Bottom Layer w0.254: R154.1@100.636,52.654 100.636,57.202 101.473,58.039 U39.1@102.972,58.039
NetR156_1: R156.1 U40.1 | length 6.7
  Bottom Layer w0.254: R156.1@100.457,40.056 100.457,44.044 101.041,44.628 U40.1@102.972,44.628
NetR158_1: R158.1 U41.1 | length 6.3
  Bottom Layer w0.762: R158.1@130.327,66.243 130.327,69.592 131.953,71.218 U41.1@132.588,71.218
NetR160_1: R160.1 U42.1 | length 6.6
  Bottom Layer w0.254: R160.1@130.226,80.086 130.226,84.023 130.89,84.687 U42.1@132.588,84.687
NetR173_1: R173.1 R176.2 R177.2 | length 17
  Bottom Layer w2.032: R173.1@14.891,34.519 22.689,34.519 R176.2@23.248,33.96 23.248,25.966 R177.2@22.961,25.679
NetR178_1: R178.1 U49.6 | length 4.1
  Bottom Layer w0.254: R178.1@86.512,26.214 86.537,26.239 90.552,26.239 U49.6@90.576,26.264
NetR179_1: R179.1 U6.5 | length 3.5
  Bottom Layer w0.254: U6.5@70.875,22.403 73.119,22.403 73.66,21.861 R179.1@73.66,21.361
RELAY_A1: K1.1 P2.9 | length 37.5
  Bottom Layer w0.508: P2.9@121.705,143.789 P2.9@121.527,143.967 121.527,142.633 139.949,124.211 K1.1@139.949,114.377 ; P2.9@121.895,143.935 P2.9@121.927,143.967
RELAY_A2: K4.1 P2.15 | length 111.8
  Top Layer w0.508: P2.15@114.027,143.967 114.027,141.066 130.778,124.314 130.778,49.232 133.064,46.946 K4.1@139.949,46.946
RELAY_A3: K7.1 P2.4 | length 24.5
  Top Layer w0.508: P2.4@129.027,146.467 127.896,145.336 127.896,139.888 K7.1@139.964,127.82 ; P2.4@129.267,146.227 P2.4@129.547,146.507
RELAY_A4: K10.1 P2.16 | length 127.4
  Top Layer w0.508: P2.16@114.307,146.507 113.516,145.717 112.896,145.096 112.896,141.003 113.106,140.792 129.946,123.952 129.946,38.862 135.056,33.752 K10.1@139.949,33.752
RELAY_A5: K13.1 P2.25 | length 19.7
  Top Layer w0.762: P2.25@101.607,143.967 101.607,140.913 110.195,132.324 K13.1@110.195,127.871
RELAY_A6: K15.1 P2.19 | length 31.8
  Bottom Layer w0.508: P2.19@109.027,143.967 109.027,140.96 112.243,137.744 112.243,125.552 110.195,123.505 K15.1@110.195,114.383
RELAY_A7: K17.1 P2.20 | length 48.7
  Bottom Layer w0.508: P2.20@109.227,146.507 110.358,145.376 110.358,141.661 113.386,138.633 113.386,124.689 111.989,123.292 111.989,107.594 110.195,105.801 K17.1@110.195,100.896
RELAY_A8: K19.1 P2.18 | length 63.7
  Bottom Layer w0.508: K19.1@110.195,87.408 116.484,93.697 116.484,138.709 112.896,142.298 112.896,145.378 P2.18@111.767,146.507
RELAY_A9: K3.1 P2.22 | length 79.3
  Top Layer w0.508: P2.22@106.687,146.507 107.658,145.536 107.658,141.72 116.561,132.817 116.561,80.286 K3.1@110.195,73.921
RELAY_A10: K6.1 P2.28 | length 91.4
  Top Layer w0.508: P2.28@99.067,146.507 100.381,145.193 100.381,140.564 108.128,132.817 108.128,77.165 106.959,75.997 106.959,68.936 110.231,65.664 K6.1@110.231,60.738
RELAY_A11: K9.1 P2.29 | length 104
  Top Layer w0.635: P2.29@96.527,143.967 96.527,139.16 102.819,132.867 102.819,51.994 107.867,46.946 K9.1@110.195,46.946
RELAY_A12: K12.1 P2.12 | length 85.1
  Top Layer w0.508: P2.12@119.387,146.507 117.896,145.016 117.896,141.946 133.045,126.797 133.045,76.149 135.276,73.919 K12.1@139.949,73.919
RELAY_A13: K14.1 P2.10 | length 70.4
  Top Layer w0.508: P2.10@121.526,146.467 120.396,145.336 120.396,142.596 134.544,128.448 134.544,88.697 135.836,87.405 K14.1@139.949,87.405 ; P2.10@121.706,146.287 P2.10@121.927,146.507
RELAY_A14: K16.1 P2.8 | length 54.8
  Bottom Layer w0.508: P2.8@124.027,146.467 122.896,145.336 122.896,142.162 141.529,123.529 141.529,107.366 139.949,105.786 K16.1@139.949,100.891 ; P2.8@124.227,146.267 P2.8@124.467,146.507
RELAY_A15: K18.1 P2.14 | length 101.3
  Top Layer w0.508: P2.14@116.847,146.507 115.396,145.056 115.396,141.068 131.496,124.968 131.496,61.29 132.354,60.432 K18.1@139.949,60.432
RELAY_B1: K1.3 P2.6 | length 53.3
  Bottom Layer w0.508: P2.6@126.527,146.467 125.396,145.336 125.396,142.295 131.42,136.271 137.668,136.271 145.517,128.422 145.517,108.945 K1.3@143.449,106.877 ; P2.6@126.746,146.247 P2.6@127.007,146.507
RELAY_B2: K4.3 P2.2 | length 115.1
  Top Layer w0.508: P2.2@131.526,146.467 130.396,145.336 130.396,141.359 145.593,126.162 145.593,41.59 K4.3@143.449,39.446 ; P2.2@131.786,146.207 P2.2@132.087,146.507
RELAY_B3: K7.3 P2.7 | length 35.4
  Bottom Layer w0.508: P2.7@124.027,143.967 124.027,142.318 130.708,135.636 137.109,135.636 143.464,129.281 K7.3@143.464,120.32
RELAY_B4: K10.3 P2.1 | length 125.1
  Top Layer w0.762: P2.1@131.527,143.967 131.527,142.169 146.431,127.265 146.431,29.234 K10.3@143.449,26.252
RELAY_B5: K13.3 P2.23 | length 27.6
  Top Layer w0.762: P2.23@104.147,143.967 104.115,143.935 104.115,141.173 113.695,131.592 K13.3@113.695,120.371
RELAY_B6: K15.3 P2.17 | length 39.5
  Bottom Layer w0.508: P2.17@111.527,143.967 111.527,142.346 115.494,138.379 115.494,108.682 K15.3@113.695,106.883
RELAY_B7: K17.3 P2.24 | length 58
  Top Layer w0.508: P2.24@104.147,146.507 105.181,145.472 105.181,141.757 114.826,132.112 114.826,94.527 K17.3@113.695,93.396
RELAY_B8: K19.3 P2.21 | length 68.6
  Top Layer w0.508: P2.21@106.687,143.967 106.655,143.935 106.655,141.783 115.697,132.74 115.697,81.91 K19.3@113.695,79.908
RELAY_B9: K3.3 P2.26 | length 89.3
  Top Layer w0.508: P2.26@101.607,146.507 102.87,145.244 102.87,140.97 111.684,132.156 111.684,77.851 108.255,74.422 108.255,69.494 111.328,66.421 K3.3@113.695,66.421
RELAY_B10: K6.3 P2.27 | length 99.1
  Top Layer w0.508: P2.27@99.067,143.967 99.067,139.947 105.207,133.807 105.207,57.81 109.779,53.238 K6.3@113.731,53.238
RELAY_B11: K9.3 P2.30 | length 116.7
  Top Layer w0.508: 97.815,139.751 97.815,145.218
  Top Layer w0.635: P2.30@96.527,146.507 97.815,145.218 ; 97.815,139.751 104.089,133.477 104.089,52.553 108.102,48.539 112.37,48.539 113.695,47.214 K9.3@113.695,39.446
RELAY_B12: K12.3 P2.13 | length 91.4
  Top Layer w0.508: P2.13@116.527,143.967 116.527,141.766 132.258,126.035 132.258,72.949 138.788,66.419 K12.3@143.449,66.419
RELAY_B13: K14.3 P2.11 | length 77.5
  Top Layer w0.508: P2.11@119.027,143.967 119.027,141.857 133.731,127.152 133.731,84.023 135.458,82.296 141.058,82.296 K14.3@143.449,79.905
RELAY_B14: K16.3 P2.5 | length 63.5
  Bottom Layer w0.508: P2.5@126.527,143.967 126.531,143.963 126.531,142.455 132.004,136.982 138.125,136.982 146.304,128.803 146.304,96.246 K16.3@143.449,93.391
RELAY_B15: K18.3 P2.3 | length 98.2
  Top Layer w0.508: P2.3@129.027,143.967 129.027,140.357 144.882,124.502 144.882,54.365 K18.3@143.449,52.932
RELAY_C1: K1.2
RELAY_C2: K4.2
RELAY_C3: K7.2
RELAY_C4: K10.2
RELAY_C5: K13.2
RELAY_C6: K15.2
RELAY_C7: K17.2
RELAY_C8: K19.2
RELAY_C9: K3.2
RELAY_C10: K6.2
RELAY_C11: K9.2
RELAY_C12: K12.2
RELAY_C13: K14.2
RELAY_C14: K16.2
RELAY_C15: K18.2
VCC_5V_ISO: C67.1 C68.1 C162.1 L3.2 P1.16 U6.4 | length 79.5
  Top Layer w1.016: v3(62.001,10.185) 95.504,10.185 97.511,8.179 97.511,3.531 99.644,1.397 106.157,1.397 P1.16@108.22,3.46
  Bottom Layer w0.254: C162.1@59.588,10.286 59.588,21.59 60.377,22.379 C68.1@62.179,22.379 65.651,22.379 U6.4@65.675,22.403
  Bottom Layer w1.016: C67.1@55.651,10.21 C162.1@59.588,10.21 ; C162.1@59.588,10.286 59.596,10.278 61.875,10.278 61.967,10.185 v3(62.001,10.185) 63.693,10.185 L3.2@63.846,10.338
pads on no net: T1.1 T2.1 T3.1 T4.1 U6.2 U6.3

## Polygon pours and split planes (outlines as drawn)
GND on Bottom Layer "GND_L04_P006" (solid, remove dead copper, pour order 6): 108.153,-6.477 106.299,-4.623 106.299,4.75 106.629,5.08 97.104,5.08 95.301,3.277 33.757,3.277 34.823,2.21 34.823,-8.255 106.07,-8.255 108.179,-6.147
GND on Bottom Layer "GND_L04_P005" (solid, remove dead copper, pour order 5): 6.706,154.229 77.419,154.229 81.128,150.52 81.128,35.331 74.981,29.185 54.077,29.185 51.46,26.568 51.46,-3.683 51.181,-3.962 49.86,-2.642 26.797,-2.642 25.273,-1.118 25.273,16.358 29.794,20.879 29.794,31.725 33.757,35.687 33.757,60.833 77.419,60.833 77.419,142.062 74.6,144.882 24.206,144.882 24.206,139.776 8.433,139.776 8.433,152.883 6.909,154.407
FGND on Bottom Layer "FGND_L04_P002" (solid, remove dead copper, pour order 2): 55.55,27.229 80.747,27.229 84.277,30.759 84.277,133.045 84.633,133.401 98.831,133.401 99.763,132.47 99.763,40.039 105.258,34.544 115.849,34.544 118.262,36.957 118.262,129.667 127.965,129.667 129.261,128.372 129.261,-0.457 128.194,-1.524 55.753,-1.524 55.753,26.645 55.397,27
GND on Top Layer "GND_L01_P004" (solid, remove dead copper, pour order 4): 6.706,154.229 77.419,154.229 81.128,150.52 81.128,35.331 74.981,29.185 54.077,29.185 51.46,26.568 51.46,-3.683 51.181,-3.962 49.86,-2.642 26.797,-2.642 25.273,-1.118 25.273,16.358 29.794,20.879 29.794,31.725 33.757,35.687 33.757,60.833 77.419,60.833 77.419,142.062 74.6,144.882 24.206,144.882 24.206,139.776 8.433,139.776 8.433,152.883 6.909,154.407
FGND on Top Layer "FGND_L01_P003" (solid, remove dead copper, pour order 3): 55.55,27.229 80.747,27.229 84.277,30.759 84.277,133.045 84.633,133.401 98.831,133.401 99.763,132.47 99.763,40.039 105.258,34.544 115.849,34.544 118.262,36.957 118.262,129.667 120.777,129.667 128.194,122.25 128.194,-1.524 55.753,-1.524 55.753,26.645 55.397,27

## Keep-outs
Keep-Out Layer:
  lines w0.127: -2.552,-17.247 ccw(c-0.552,-17.247) -0.552,-19.247 ; 470.929,-18.916 ccw(c470.929,-16.916) 472.929,-16.916 ; 470.948,155.778 cw(c470.948,153.778) 472.948,153.778
  lines w0.508: -1.492,2.33 ccw(c0.508,2.33) 0.508,0.33 ; -1.467,1.924 -1.455,147.834 cw(c0.229,147.834) 0.229,149.517 145.517,149.517 ; 0.203,0.33 145.549,0.388 ccw(c145.549,2.388) 147.549,2.388 ; 145.517,149.504 cw(c145.517,147.504) 147.517,147.504 ; 147.517,147.848 147.549,2.159

## Other copper
Bottom Layer:
  rectangle net FGND: 67.065,18.382 69.513,22.403

## Silkscreen, mask and mechanical layers (free items; w line width, h text height)
Top Overlay:
  text "485_B" at 413.9,154.864 h1.52 r270
  text "485_A" at 425.076,154.534 h1.52 r270
  text "24V" at 474.098,143.205 h1.52
  text "24V" at 480.956,143.053 h1.52
  text "DI4" at 473.945,140.919 h1.52
  text "G" at 480.956,140.767 h1.52
  text "DI5" at 474.047,138.455 h1.52
  text "G" at 480.956,138.328 h1.52
  text "DI6" at 473.971,135.738 h1.52
  text "G" at 480.956,135.738 h1.52
  text "DI" at 485.985,133.248 h1.52
  text "DI7" at 474.352,133.223 h1.52
  text "G" at 480.956,133.071 h1.52
  text "DI0" at 474.479,130.861 h1.52
  text "G" at 480.956,130.607 h1.52
  text "DI1" at 474.377,128.245 h1.52
  text "G" at 480.956,128.118 h1.52
  text "DI2" at 474.377,125.857 h1.52
  text "G" at 480.956,125.603 h1.52
  text "DI3" at 474.352,123.622 h1.52
  text "G" at 480.956,123.444 h1.52
  text "G" at 474.809,120.269 h1.52
  text "G" at 480.854,120.244 h1.52
  text "PB8" at 474.961,117.602 h1.52
  text "PB1" at 480.956,117.526 h1.52
  text "PB1" at 480.956,114.833 h1.52
  text "PB8" at 474.961,114.783 h1.52
  text "G" at 474.91,112.573 h1.52
  text "G" at 481.26,112.497 h1.52
  text "PB9" at 474.961,110.287 h1.52
  text "PB2" at 480.956,110.236 h1.52
  text "PB2" at 480.956,107.798 h1.52
  text "PB9" at 474.961,107.721 h1.52
  text "G" at 480.778,105.512 h1.52
  text "G" at 474.885,105.41 h1.52
  text "PB10" at 480.956,102.768 h1.52
  text "PB3" at 474.961,102.591 h1.52
  text "PB10" at 480.93,100.228 h1.52
  text "PB3" at 474.961,99.695 h1.52
  text "G" at 480.625,97.841 h1.52
  text "G" at 474.987,97.714 h1.52
  text "PB4" at 480.956,95.021 h1.52
  text "PB11" at 474.961,94.894 h1.52
  text "SWDIO" at 370.567,92.329 h1.52 r270
  text "SWCLK" at 365.208,92.304 h1.52 r270
  text "PB11" at 474.961,92.075 h1.52
  text "PB4" at 480.956,91.948 h1.52
  text "3.3V" at 373.361,91.389 h1.52 r270
  text "GND" at 367.824,90.399 h1.52 r270
  text "G" at 474.91,89.662 h1.52
  text "G" at 480.829,89.662 h1.52
  text "water out T" at 488.906,88.29 h1.52 r270
  text "PB5" at 480.956,87.351 h1.52
  text "PB12" at 474.961,87.173 h1.52
  text "PB12" at 474.961,84.633 h1.52
  text "PB5" at 480.956,84.506 h1.52
  text "G" at 481.108,81.915 h1.52
  text "G" at 474.885,81.89 h1.52
  text "PB13" at 474.961,78.969 h1.52
  text "PB6" at 480.956,78.867 h1.52
  text "PB13" at 474.961,76.581 h1.52
  text "PB6" at 480.956,76.352 h1.52
  text "AI0" at 474.961,72.873 h1.52
  text "24V" at 480.956,72.593 h1.52
  text "AI1" at 474.961,70.333 h1.52
  text "24V" at 480.956,70.079 h1.52
  text "AI2" at 474.961,67.742 h1.52
  text "24V" at 480.956,67.539 h1.52
  text "24V" at 480.956,65.024 h1.52
  text "AI3" at 474.961,64.999 h1.52
  text "AI4" at 474.961,62.713 h1.52
  text "24V" at 480.956,62.459 h1.52
  text "AI5" at 474.961,60.096 h1.52
  text "24V" at 480.956,59.995 h1.52
  text "AI6" at 474.961,57.607 h1.52
  text "24V" at 480.956,57.277 h1.52
  text "AI7" at 474.961,54.915 h1.52
  text "24V" at 480.956,54.864 h1.52
  text "AI8" at 474.961,52.426 h1.52
  text "24V" at 480.956,52.299 h1.52
  text "G" at 480.956,49.835 h1.52
  text "G" at 475.063,49.733 h1.52
  text "G" at 480.956,47.498 h1.52
  text "AO" at 474.961,47.346 h1.52
  text "G" at 480.956,44.806 h1.52
  text "24V" at 474.961,44.704 h1.52
  text "R20" at 474.834,40.31 h1.52
  text "R19" at 474.834,38.354 h1.52
  text "R18" at 474.834,35.814 h1.52
  text "R17" at 474.834,33.172 h1.52
  text "R16" at 474.834,30.785 h1.52
  text "R15" at 474.834,28.219 h1.52
  text "R14" at 474.834,25.679 h1.52
  text "R13" at 474.834,23.19 h1.52
  text "R12" at 474.834,20.676 h1.52
  text "AC_L" at 8.357,18.491 h1.52
  text "R11" at 474.834,18.11 h1.52
  text "AC_N" at 8.28,16.053 h1.52
  text "IO V1.0" at 125.882,15.773 h1.52
  text "R10" at 474.834,15.469 h1.52
  text "EARTH" at 8.382,13.538 h1.52
  text "R9" at 474.834,12.929 h1.52
  text "R8" at 474.834,10.465 h1.52
  text "R7" at 474.834,7.95 h1.52
  text "R6" at 474.834,5.334 h1.52
  text "R5" at 474.834,2.819 h1.52
  text "R4" at 474.834,0.279 h1.52
  text "R3" at 474.834,-2.261 h1.52
  text "R2" at 474.834,-4.775 h1.52
  text "R1" at 474.834,-7.29 h1.52
Bottom Overlay:
  text "LCD_RX" at 328.478,150.165 h1.52 r90
  text "5V" at 325.05,150.089 h1.52 r90
  text "LCD_TX" at 330.943,150.063 h1.52 r90
  text "GND" at 337.039,149.987 h1.52 r90
  text "24V" at 472.723,143.891 h1.52
  text "24V" at 464.039,143.866 h1.52
  text "DI4" at 463.887,141.58 h1.52
  text "G" at 471.1,141.427 h1.52
  text "DI5" at 463.988,139.116 h1.52
  text "G" at 471.202,138.989 h1.52
  text "DI6" at 463.912,136.398 h1.52
  text "G" at 471.354,136.398 h1.52
  text "DI7" at 464.293,133.883 h1.52
  text "G" at 471.38,133.731 h1.52
  text "DI0" at 464.42,131.521 h1.52
  text "G" at 471.38,131.267 h1.52
  text "DI1" at 464.319,128.905 h1.52
  text "G" at 471.405,128.778 h1.52
  text "DI2" at 464.319,126.517 h1.52
  text "G" at 471.456,126.263 h1.52
  text "DI3" at 464.293,124.282 h1.52
  text "G" at 471.532,123.622 h1.52
  text "PB8" at 465.436,117.831 h1.52
  text "PB1" at 472.698,117.297 h1.52
  text "PB1" at 472.698,114.859 h1.52
  text "PB8" at 465.462,114.706 h1.52
  text "PB9" at 465.258,109.779 h1.52
  text "PB2" at 472.698,109.626 h1.52
  text "PB9" at 465.309,107.544 h1.52
  text "PB2" at 472.698,107.188 h1.52
  text "PB10" at 471.405,102.997 h1.52 r90
  text "PB3" at 465.411,101.905 h1.52
  text "PB3" at 465.487,99.568 h1.52
  text "PB11" at 465.309,94.539 h1.52
  text "PB4" at 472.698,94.412 h1.52
  text "PB4" at 472.698,91.821 h1.52
  text "PB11" at 465.385,91.516 h1.52
  text "PB12" at 465.411,87.046 h1.52
  text "PB5" at 472.698,86.817 h1.52
  text "PB5" at 472.698,84.328 h1.52
  text "PB12" at 465.512,83.795 h1.52
  text "PB13" at 465.284,79.223 h1.52
  text "PB6" at 472.698,79.121 h1.52
  text "PB13" at 465.284,76.835 h1.52
  text "PB6" at 472.698,76.606 h1.52
  text "AI0" at 464.877,73.127 h1.52
  text "24V" at 472.714,72.847 h1.52
  text "AI1" at 464.852,70.587 h1.52
  text "24V" at 472.714,70.333 h1.52
  text "AI2" at 464.903,67.996 h1.52
  text "24V" at 472.714,67.793 h1.52
  text "24V" at 472.714,65.278 h1.52
  text "AI3" at 464.903,65.253 h1.52
  text "AI4" at 464.801,62.967 h1.52
  text "24V" at 472.714,62.713 h1.52
  text "AI5" at 464.725,60.35 h1.52
  text "24V" at 472.714,60.249 h1.52
  text "AI6" at 464.75,57.861 h1.52
  text "24V" at 472.714,57.531 h1.52
  text "AI7" at 464.801,55.169 h1.52
  text "24V" at 472.714,55.118 h1.52
  text "AI8" at 465.462,52.68 h1.52
  text "24V" at 472.714,52.553 h1.52
  text "G" at 471.227,50.089 h1.52
  text "G" at 471.202,47.752 h1.52
  text "AO" at 465.284,47.6 h1.52
  text "G" at 471.405,45.06 h1.52
  text "24V" at 465.258,44.958 h1.52
  text "R20" at 465.411,40.284 h1.52
  text "R19" at 472.714,37.516 h1.52
  text "R18" at 472.714,34.976 h1.52
  text "R17" at 472.714,32.334 h1.52
  text "R16" at 472.472,29.947 h1.52
  text "R15" at 472.714,27.381 h1.52
  text "R14" at 472.714,24.841 h1.52
  text "R13" at 472.714,22.352 h1.52
  text "R12" at 472.472,19.837 h1.52
  text "R11" at 472.218,17.272 h1.52
  text "R10" at 472.714,14.63 h1.52
  text "R9" at 471.812,12.09 h1.52
  text "R8" at 471.913,9.627 h1.52
  text "R7" at 471.913,7.112 h1.52
  text "R6" at 471.989,4.496 h1.52
  text "R5" at 471.837,1.981 h1.52
  text "R4" at 471.786,-0.559 h1.52
  text "R3" at 471.812,-3.099 h1.52
  text "R2" at 471.837,-5.613 h1.52
  text "R1" at 471.634,-8.128 h1.52
Mechanical 1:
  lines w0.127: 279.261,-19.4 ccw(c279.261,-17.4) 281.261,-17.4 ; 454.159,33.96 cw(c454.608,34.328) 454.239,34.777 ; 454.397,33.725 ccw(c454.847,34.093) 455.215,33.644 ; 469.856,42.316 cw(c469.894,41.77) 470.44,41.808 ; 470.44,39.751 ccw(c470.986,39.789) 471.024,39.243 ; 471.082,155.931 cw(c471.082,153.931) 473.082,153.931 ; 471.151,39.243 ccw(c471.113,39.789) 471.659,39.827
  lines w0.508: -2,2 ccw(c0,2) 0,0 146,0 ccw(c146,2) 148,2 148,148 ccw(c146,148) 146,150 0,150 ccw(c0,148) -2,148 -2,2 ; 26.137,21.844 28.346,21.844 28.346,57.125 26.137,57.125 26.137,21.844 ; 51.46,135.357 51.46,143.916 54.381,143.916 74.397,143.916 76.632,141.681 76.632,131.597 74.549,131.597 74.549,139.979 72.568,141.961 54.534,141.961 54.534,135.357 51.46,135.357

## Dimensions
-2.739,-17.4 to 281.261,-17.4 on Keep-Out Layer
-0.967,-19.4 to -0.758,155.6 on Keep-Out Layer

## Text inside footprints (layer, text, board x,y; h text height)
P1: Top Overlay "22" at 99.076,3.968 h1.52 r180; Top Overlay "21" at 99.076,6.508 h1.52 r180; Top Overlay "2" at 128.54,3.968 h1.52 r180; Top Overlay "1" at 128.54,6.508 h1.52 r180
P3: Top Overlay "2" at 22.54,143.968 h1.52 r180; Top Overlay "1" at 22.032,146.508 h1.52 r180; Top Overlay "7" at 10.856,146.508 h1.52 r180; Top Overlay "8" at 10.856,143.968 h1.52 r180